# EAGLE board CT_schematic2 (EAGLE 7.6.0)

Size 100 x 100 mm. Coordinates in mm from the lower left corner, seen from the top.
Outline: 89,2.5 61.5,30 38.5,30 11,2.5 10,1.5 9,0.8 7.8,0.2 6.2,0 5.2,0 4.2,0.2 3.5,0.5 3,0.8 2.2,1.2 1.5,2 0.8,3 0.2,4 0,5.5 0,6.8 0.2,7.8 0.5,8.5 0.8,9 1.2,9.8 1.5,10 1.8,10.2 2.5,11 30,38.5 30,60.8 2.5,88.2 1.8,89 1,90 0.2,91.5 0,93 0,94.8 0.5,96 1,97 1.8,98 3,99 4,99.5 5.5,100 7.2,100 8.5,99.8 9.5,99.2 10.2,98.8 11.2,98 11.8,97.5 39.2,70 61.5,70 89,97.5 90,98.5 91,99.2 92.2,99.8 93.2,100 94.5,100 94.8,100 95.8,99.8 96.5,99.5 97,99.2 97.8,98.8 98.2,98.2 98.8,97.8 99.2,97 99.8,95.5 100,94.5 100,93.2 99.8,92.2 99.2,91 98.5,90 97.5,89 70,61.5 70,38.5 97.5,11 98.5,10 99.2,9 99.8,8 100,7 100,5.2 99.8,4.2 99.5,3.5 99.2,3 98.8,2.2 98.2,1.8 97.8,1.2 97,0.8 96.5,0.5 95.8,0.2 94.8,0 94,0 93.2,0 92.2,0.2 91.5,0.5 90.8,1 90,1.5 89,2.5
Copper layers (1*16): Top 0.035mm / dielectric 1.5mm / Bottom 0.035mm
Design rules "default": minimum track width 10mil, minimum drill 24mil, track to track 8mil, track to pad 8mil, pad to pad 8mil, via to via 8mil, smd to smd 8mil, copper to edge 40mil, drill to drill 8mil, minimum pad ring 10mil, minimum via ring 8mil, stop-mask expansion 4mil, vias tented up to drill 0mil, thermal gap 10mil

## Footprints (pad centres in the part's own frame; a part is rotated, then mirrored left to right if it is on the bottom)
C0603 = smd 0.8 x 0.8: 1 -0.762,0; 2 0.762,0
C0402 = smd 0.5 x 0.5: 1 -0.508,0; 2 0.508,0
C1210 = smd 1.2 x 2.5: 1 -1.524,0; 2 1.524,0
C1206 = smd 1.3 x 1.6: 1 -1.524,0; 2 1.524,0
L0603 = smd 0.8 x 0.8: 1 -0.762,0; 2 0.762,0
R0603 = smd 0.8 x 0.8: 1 -0.762,0; 2 0.762,0
LQFP32 = smd 0.54 x 0.85: 1 -2.8,-4.275; 2 -2,-4.275; 3 -1.2,-4.275; 4 -0.4,-4.275; 5 0.4,-4.275; 6 1.19,-4.275; 7 1.99,-4.275; 8 2.79,-4.275; 17 2.8,4.275; 18 2,4.275; 19 1.2,4.275; 20 0.4,4.275; 21 -0.4,4.275; 22 -1.2,4.275; 23 -2,4.275; 24 -2.8,4.275 | smd 0.85 x 0.54: 9 4.275,-2.8; 10 4.275,-2; 11 4.275,-1.2; 12 4.275,-0.4; 13 4.275,0.4; 14 4.275,1.2; 15 4.275,2; 16 4.275,2.8; 25 -4.275,2.8; 26 -4.275,2; 27 -4.275,1.2; 28 -4.275,0.4; 29 -4.275,-0.4; 30 -4.275,-1.2; 31 -4.275,-2; 32 -4.275,-2.8
SAMTEC_FTSH-105-01-L-DV-K = smd 0.762 x 2.794: 1 -2.54,-2.032; 2 -2.54,2.032; 3 -1.27,-2.032; 4 -1.27,2.032; 5 0,-2.032; 6 0,2.032; 7 1.27,-2.032; 8 1.27,2.032; 9 2.54,-2.032; 10 2.54,2.032
QFN24_2 = smd 0.6 x 0.2: 1 -1.6,1; 2 -1.6,0.6; 3 -1.6,0.2; 4 -1.6,-0.2; 5 -1.6,-0.6; 6 -1.6,-1; 13 1.6,-1; 14 1.6,-0.6; 15 1.6,-0.2; 16 1.6,0.2; 17 1.6,0.6; 18 1.6,1 | smd 0.2 x 0.6: 7 -1,-1.6; 8 -0.6,-1.6; 9 -0.2,-1.6; 10 0.2,-1.6; 11 0.6,-1.6; 12 1,-1.6; 19 1,1.6; 20 0.6,1.6; 21 0.2,1.6; 22 -0.2,1.6; 23 -0.6,1.6; 24 -1,1.6 | smd 1.75 x 1.59: 25 0,0
XCVR_SPBTLE-RF = smd 1.6 x 1: 1 -6.75,0.33; 2 -6.75,-0.94; 3 -6.75,-2.21; 4 -6.75,-3.48; 5 -6.75,-4.75; 7 6.75,-4.75; 8 6.75,-3.48; 9 6.75,-2.21; 10 6.75,-0.94; 11 6.75,0.33 | smd 1 x 1.6: 6 -2.75,-5.75
FCI_10118193-0001LF = smd 0.4 x 1.35: 1 -1.3,2.675; 2 -0.65,2.675; 3 0,2.675; 4 0.65,2.675; 5 1.3,2.675 | smd 1.6 x 1.4: 6 -3.2,2.45; 7 3.2,2.45 | smd 1.9 x 1.9: 8 -1.2,0; 9 1.2,0 | hole 0.5: -3.3,0; 3.3,0
SOT143B = smd 1 x 0.7: 1 -0.75,-1 | smd 0.6 x 0.7: 2 0.95,-1; 3 0.95,1; 4 -0.95,1
ASEK = smd 1.4 x 1: 1 -1.1,-0.8; 2 1.1,-0.8; 3 1.1,0.8; 4 -1.1,0.8
SOIC-8_EP = smd 1.6 x 0.533: 1 -2.921,1.905; 2 -2.921,0.635; 3 -2.921,-0.635; 4 -2.921,-1.905; 5 2.921,-1.905; 6 2.921,-0.635; 7 2.921,0.635; 8 2.921,1.905 | smd 2.54 x 3.302: EPAD 0,0 | drill 0.406 pad 0.406: P$1 -0.508,0.635; P$2 0.381,0.635; P$3 -0.508,-0.635; P$4 0.381,-0.635
DFN8_2X3MC = smd 0.813 x 0.305: 1 -1.398,0.75; 2 -1.398,0.25; 3 -1.398,-0.25; 4 -1.398,-0.75; 5 1.398,-0.75; 6 1.398,-0.25; 7 1.398,0.25; 8 1.398,0.75 | smd 1.753 x 1.549: 9 0,0
JST-2-SMD = smd 1 x 4.6: 1 -1,-3.7; 2 1,-3.7 | smd 1.6 x 3.4: NC1 -3.4,1.5; NC2 3.4,1.5
SON-6 = smd 0.55 x 0.3: 1 -0.355,0.5 | smd 0.52 x 0.3: 2 -0.37,0; 3 -0.37,-0.5; 4 0.37,-0.5; 5 0.37,0; 6 0.37,0.5
SW_4-1437565-2 = smd 1.4 x 2.1: 1 -2.23,4.55; 2 -2.23,-4.55; 3 2.23,4.55; 4 2.23,-4.55
LGM67K-G1J2-24-Z = smd 0.8 x 1.4: A -2,0; C 0,0
NC7SZ125M5X = smd 1.3 x 0.7: 1 -1.3,0.95; 2 -1.3,0; 3 -1.3,-0.95; 4 1.3,-0.95; 5 1.3,0.95
DUMMY_PACKAGE_150 = drill 0.3: 1 0,-1; 2 1.5,-1; 3 3,-1; 4 4.5,-1; 5 6,-1; 6 7.5,-1

## Placement (x,y rotation side)
C1  c1  [C0603]  67.69,37.62 0 top
C2  c2  [C0603]  59.51,41.65 0 top
C3  c3  [C0603]  67.69,52.38 0 top
C4  c4  [C0603]  67.69,45 0 bottom
C5  c5  [C0603]  51.33,45 0 bottom
C6  c6  [C0603]  56.28,48.35 180 top
C7  c7  [C0603]  59.54,52.38 0 bottom
C8  c8  [C0402]  4.18,11.01 0 top
C9  c9  [C0402]  54.59,32.62 180 bottom
C10  c10  [C0402]  59.51,30.81 0 top
C11  c11  [C0402]  65.16,30.81 0 top
C12  c12  [C0603]  56.28,45 0 top
C13  c13  [C0402]  55.32,54.17 90 top
C14  c14  [C0402]  59.51,58.92 0 top
C15  c15  [C1210]  33.67,49.48 90 top
C16  c16  [C1210]  36.66,57.58 0 top
C17  c17  [C1210]  36.66,57.58 0 bottom
C18  c18  [C1210]  65.79,57.58 0 top
C19  c19  [C0402]  20.62,27.45 270 bottom
C20  c20  [C1206]  24.7,28.05 270 bottom
C21  c21  [C1206]  14.79,10.5 0 bottom
C22  c22  [C0402]  46.62,35.78 0 bottom
C23  c23  [C0402]  39.36,31.11 0 bottom
C24  c24  [C0402]  37.53,45.37 270 bottom
F1  f1  [L0603]  59.54,55.73 0 bottom
R1  r1  [R0603]  67.04,43.28 270 top
R2  r2  [R0603]  33.54,41.53 0 top
R3  r3  [R0603]  63.69,43.28 270 top
R4  r4  [R0603]  38.1,35.1 270 bottom
R5  r5  [R0603]  63.69,53.18 270 bottom
R6  r6  [R0603]  59.54,34.27 180 bottom
R7  r7  [R0603]  59.54,37.62 180 bottom
R8  r8  [R0603]  63.69,48.23 90 top
R9  r9  [R0603]  11.59,6.68 0 bottom
R10  r10  [R0603]  14.71,14.32 0 bottom
R11  r11  [R0603]  14.71,11.01 180 top
R12  r12  [R0603]  8.82,11.01 0 bottom
R13  r13  [R0603]  64.49,35.81 0 bottom
R14  r14  [R0603]  54.59,35.81 180 bottom
R15  r15  [R0603]  52.13,49.15 270 bottom
R16  r16  [R0603]  52.13,40.85 270 bottom
R17  r17  [R0603]  42.25,39.25 0 bottom
R18  r18  [R0603]  45,50.33 0 bottom
R19  r19  [R0603]  45,46.98 180 bottom
R20  r20  [R0603]  33.95,37.38 90 top
R21  r21  [R0603]  33.95,32.26 0 bottom
R22  r22  [R0603]  29.8,32.26 90 bottom
R23  r23  [R0603]  29.8,27.14 90 top
R24  r24  [R0603]  33.95,27.94 180 top
R25  r25  [R0603]  24.7,22.08 270 bottom
R26  r26  [R0603]  24.7,26.23 0 top
U1  u1  [LQFP32]  59.51,45 180 bottom
U2  u2  [SAMTEC_FTSH-105-01-L-DV-K]  11.59,11.01 225 top
U3  u3  [QFN24_2]  59.51,35.81 270 top
U4  u4  [XCVR_SPBTLE-RF]  45,45 0 top
U5  u5  [FCI_10118193-0001LF]  50,31.75 0 top
U6  u6  [SOT143B]  5,5 0 top
U7  u7  [ASEK]  59.51,53.51 270 top
U8  u8  [SOIC-8_EP]  45,57.58 90 top
U9  u9  [DFN8_2X3MC]  24.7,21.92 180 top
U10  u10  [JST-2-SMD]  19.08,21.92 45 top
U11  u11  [SON-6]  33.95,42.62 270 bottom
U12  u12  [SW_4-1437565-2]  29.42,32.26 315 top
U13  u13  [LGM67K-G1J2-24-Z]  46.62,32.26 180 bottom
U14  u14  [NC7SZ125M5X]  30.63,26.66 270 bottom
U15  u15  [NC7SZ125M5X]  39.36,32.26 90 top
U16  u16  [NC7SZ125M5X]  33.54,37.87 270 bottom
U17  u17  [DUMMY_PACKAGE_150]  52.57,57.58 90 bottom

## Library data of the parts
C1-C24 F1 R1-R26 U1-U17 = circuit_tree

## Nets
CLK_U1_2: U1.2 U7.3
GND: C1.2 C2.2 C3.2 C4.2 C5.2 C6.2 C7.2 C8.2 C9.2 C10.2 C11.2 C12.2 C13.2 C14.2 C15.2 C16.2 C17.2 C18.2 C19.2 C20.2 C21.2 C22.2 C23.2 C24.2 R2.2 R8.2 R12.2 R16.2 R17.2 R19.2 R22.2 R24.2 R25.2 U1.16 U1.32 U2.3 U2.5 U3.18 U3.20 U3.25 U4.6 U5.5 U5.6 U5.7 U5.8 U5.9 U6.1 U7.2 U8.7 U8.EPAD U9.6 U9.9 U10.2 U11.2 U13.C U14.2 U14.3 U15.1 U15.3 U16.1 U16.3 U17.1
INPUT_USBPOWER_5V: C20.1 R26.2 U5.1 U6.4 U9.1 U9.2
NET_U1_4: R5.1 U1.4 U16.4
NET_U1_5: C6.1 C7.1 F1.1 U1.5
NET_U1_27: R3.1 U1.27 U13.A
NET_U1_28: R1.1 U1.28 U12.3 U12.4
NET_U1_29: R6.1 U1.29 U3.23
NET_U1_30: R7.1 U1.30 U3.24
NET_U1_31: R8.1 U1.31
NET_U2_9: R12.1 U2.9
NET_U3_9: R14.1 U3.9
NET_U3_10: C9.1 U3.10
NET_U3_22: R13.1 U3.22
NET_U4_11: R4.1 U4.11 U15.4
NET_U8_4: R18.2 R19.1 U8.4
NET_U9_5: R26.1 U9.5
NET_U9_8: R25.1 U9.8
NET_U11_1: R21.1 R22.1 U11.1
NET_U11_3: R23.2 R24.1 U11.3
NET_U11_4: R20.1 U11.4 U14.4 U15.2 U16.2
NET_U12_1: R2.1 U12.1 U12.2
PROC_GPIO_TO_U3_FSYNC: U1.6 U3.11
PROC_GPIO_TO_U3_INT_B: U1.3 U3.12
PROC_GPIO_TO_U4_SPI_IRQ: R17.1 U1.7 U4.4
PROC_PA2: U1.8 U17.2
PROC_PA3: U1.9 U17.3
PROC_PB0: U1.14 U17.4
PROC_PB1: U1.15 U17.5
PROC_SPI1_MISO: U1.12 U4.8
PROC_SPI1_MOSI: U1.13 U4.9
PROC_SPI1_NSS: R15.1 U1.10 U4.10
PROC_SPI1_SCK: R16.1 U1.11 U4.7
PROC_SYS_SWCLK: R10.1 U1.24 U2.4
PROC_SYS_SWDIO: R11.1 U1.23 U2.2
PROC_USB_DM: U1.21 U5.2 U6.3
PROC_USB_DP: U1.22 U5.3 U6.2
RST_OUT_U2_JTAG_RST_B: R9.1 U2.10 U14.1
VCC_S1_3V7: C15.1 C16.1 C21.1 U8.5 U8.8 U9.3 U9.4 U10.1
VCC_TIER1_3V3: C1.1 C2.1 C3.1 C4.1 C5.1 C8.1 C10.1 C11.1 C12.1 C13.1 C14.1 C17.1 C18.1 C19.1 C22.1 C23.1 C24.1 F1.2 R1.2 R3.2 R4.2 R5.2 R6.2 R7.2 R9.2 R10.2 R11.2 R13.2 R14.2 R15.2 R18.1 R20.2 R21.2 R23.1 U1.1 U1.17 U2.1 U3.1 U3.8 U3.13 U4.5 U7.4 U8.1 U11.6 U14.5 U15.5 U16.5

## Tracks (layer width: path | path; a pad name or v marks a point on that pad's centre or on a via)
CLK_U1_2  (1 unrouted)
GND  (61 unrouted)
INPUT_USBPOWER_5V  (5 unrouted)
NET_U1_4  (2 unrouted)
NET_U1_5  (3 unrouted)
NET_U1_27  (2 unrouted)
NET_U1_28  (3 unrouted)
NET_U1_29  (2 unrouted)
NET_U1_30  (2 unrouted)
NET_U1_31  (1 unrouted)
NET_U2_9  (1 unrouted)
NET_U3_9  (1 unrouted)
NET_U3_10  (1 unrouted)
NET_U3_22  (1 unrouted)
NET_U4_11  (2 unrouted)
NET_U8_4  (2 unrouted)
NET_U9_5  (1 unrouted)
NET_U9_8  (1 unrouted)
NET_U11_1  (2 unrouted)
NET_U11_3  (2 unrouted)
NET_U11_4  (4 unrouted)
NET_U12_1  (2 unrouted)
PROC_GPIO_TO_U3_FSYNC  (1 unrouted)
PROC_GPIO_TO_U3_INT_B  (1 unrouted)
PROC_GPIO_TO_U4_SPI_IRQ  (2 unrouted)
PROC_PA2  (1 unrouted)
PROC_PA3  (1 unrouted)
PROC_PB0  (1 unrouted)
PROC_PB1  (1 unrouted)
PROC_SPI1_MISO  (1 unrouted)
PROC_SPI1_MOSI  (1 unrouted)
PROC_SPI1_NSS  (2 unrouted)
PROC_SPI1_SCK  (2 unrouted)
PROC_SYS_SWCLK  (2 unrouted)
PROC_SYS_SWDIO  (2 unrouted)
PROC_USB_DM  (2 unrouted)
PROC_USB_DP  (2 unrouted)
RST_OUT_U2_JTAG_RST_B  (2 unrouted)
VCC_S1_3V7  (7 unrouted)
VCC_TIER1_3V3  (46 unrouted)

## Text on the board
bPlace: Automated Designs created at http://circuit-tree.com